# Altium PCB GL850G-PCB.PcbDoc
Units mil, origin at the board's own origin, x right, y up, seen from the top; angles counter-clockwise.
Board outline 1974.53 x 1974.45 mil, 2 copper layers (Top, Bottom), stack 62.543 mil thick; 40 components, 27 nets, 137 pads, 239 vias.
Unrouted connection lines stored in the file: 40.
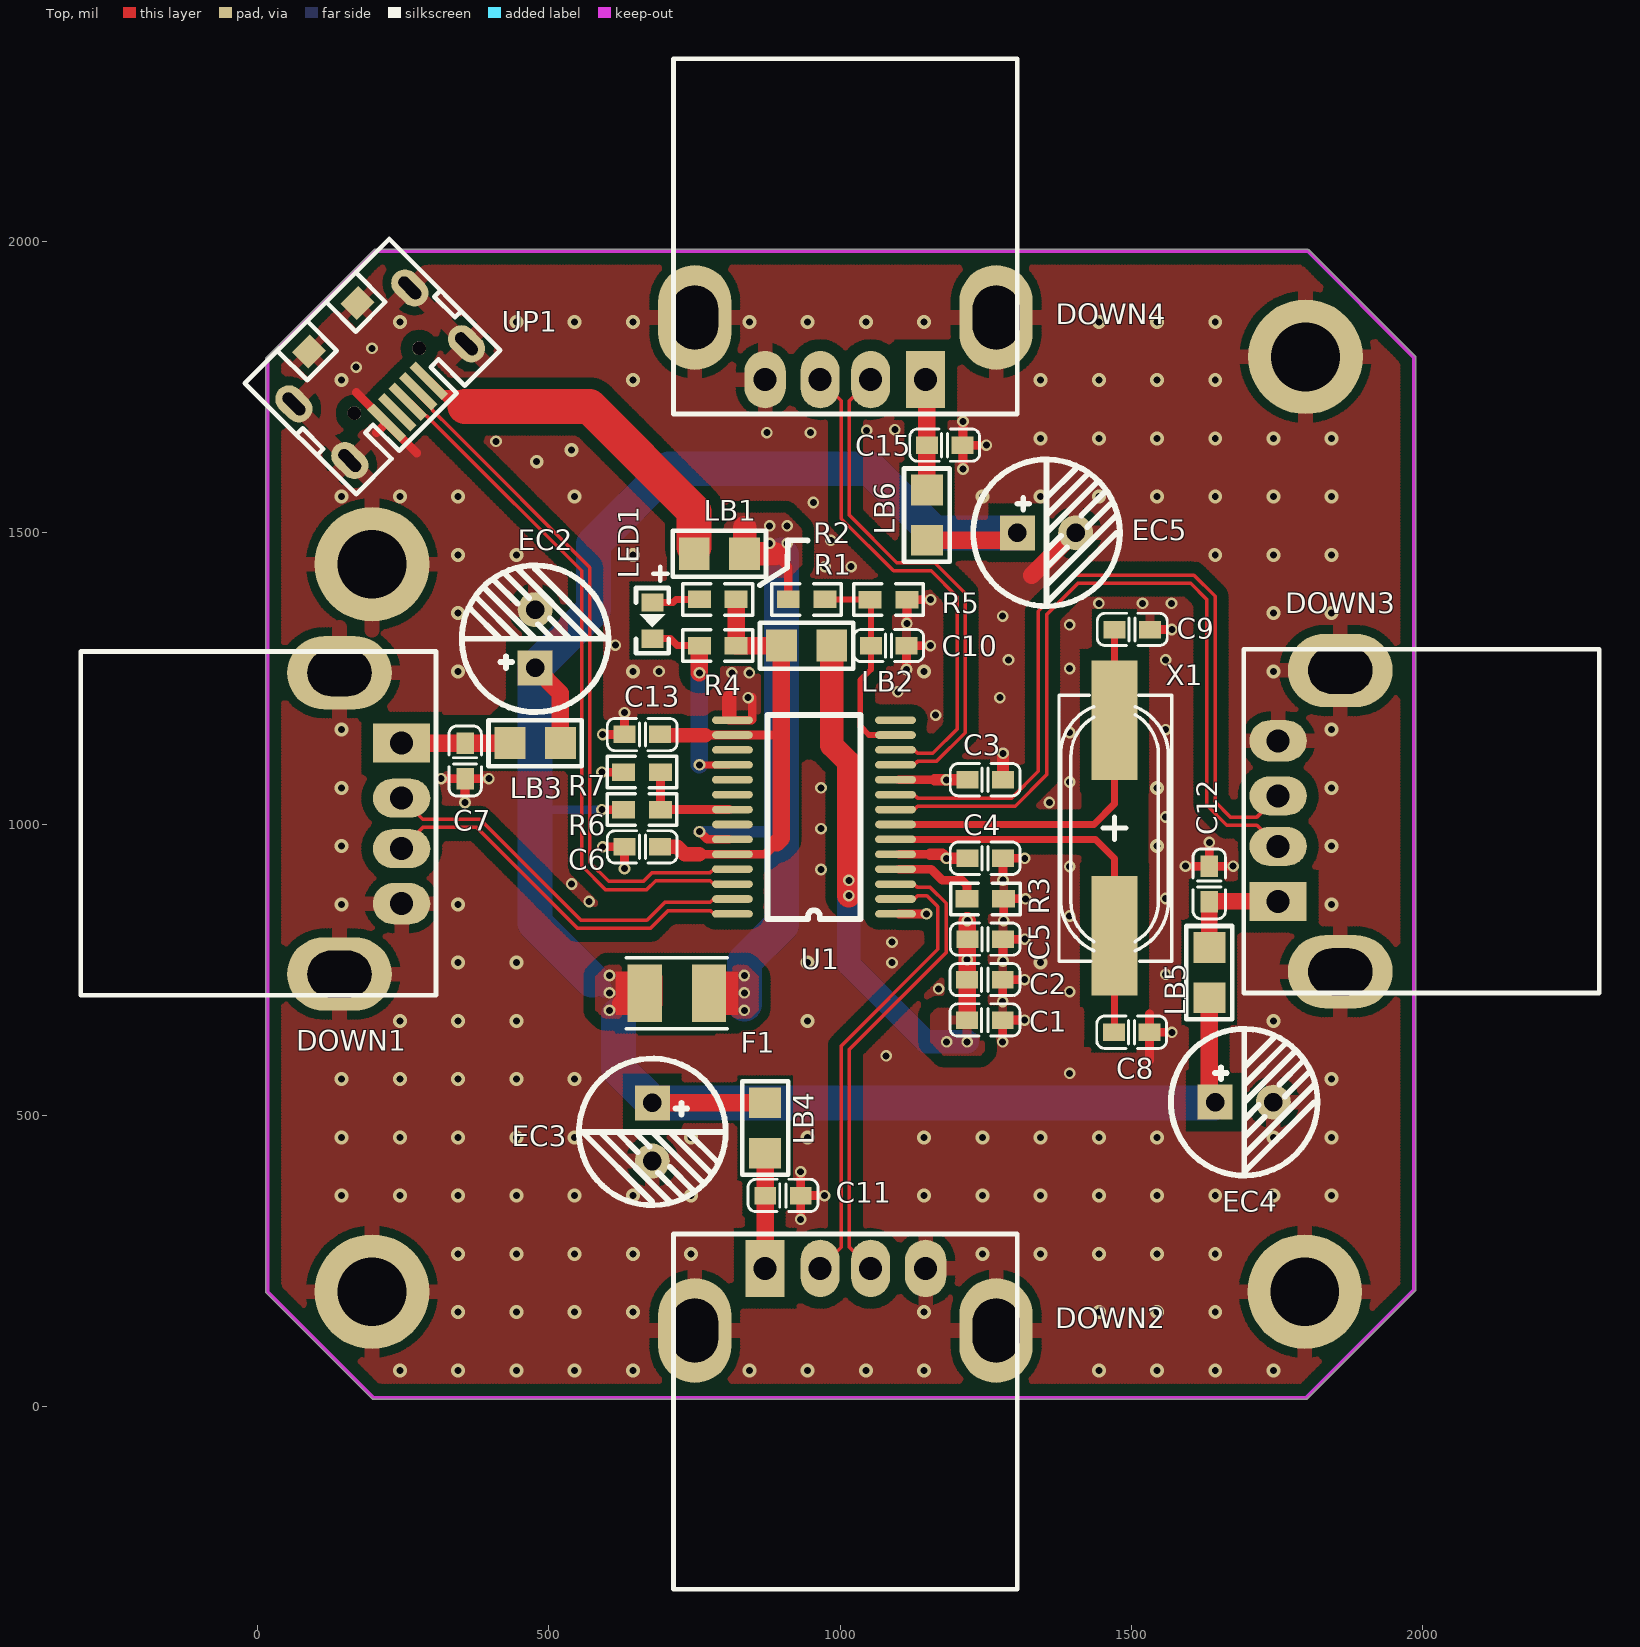
[diagram p0: Top view]
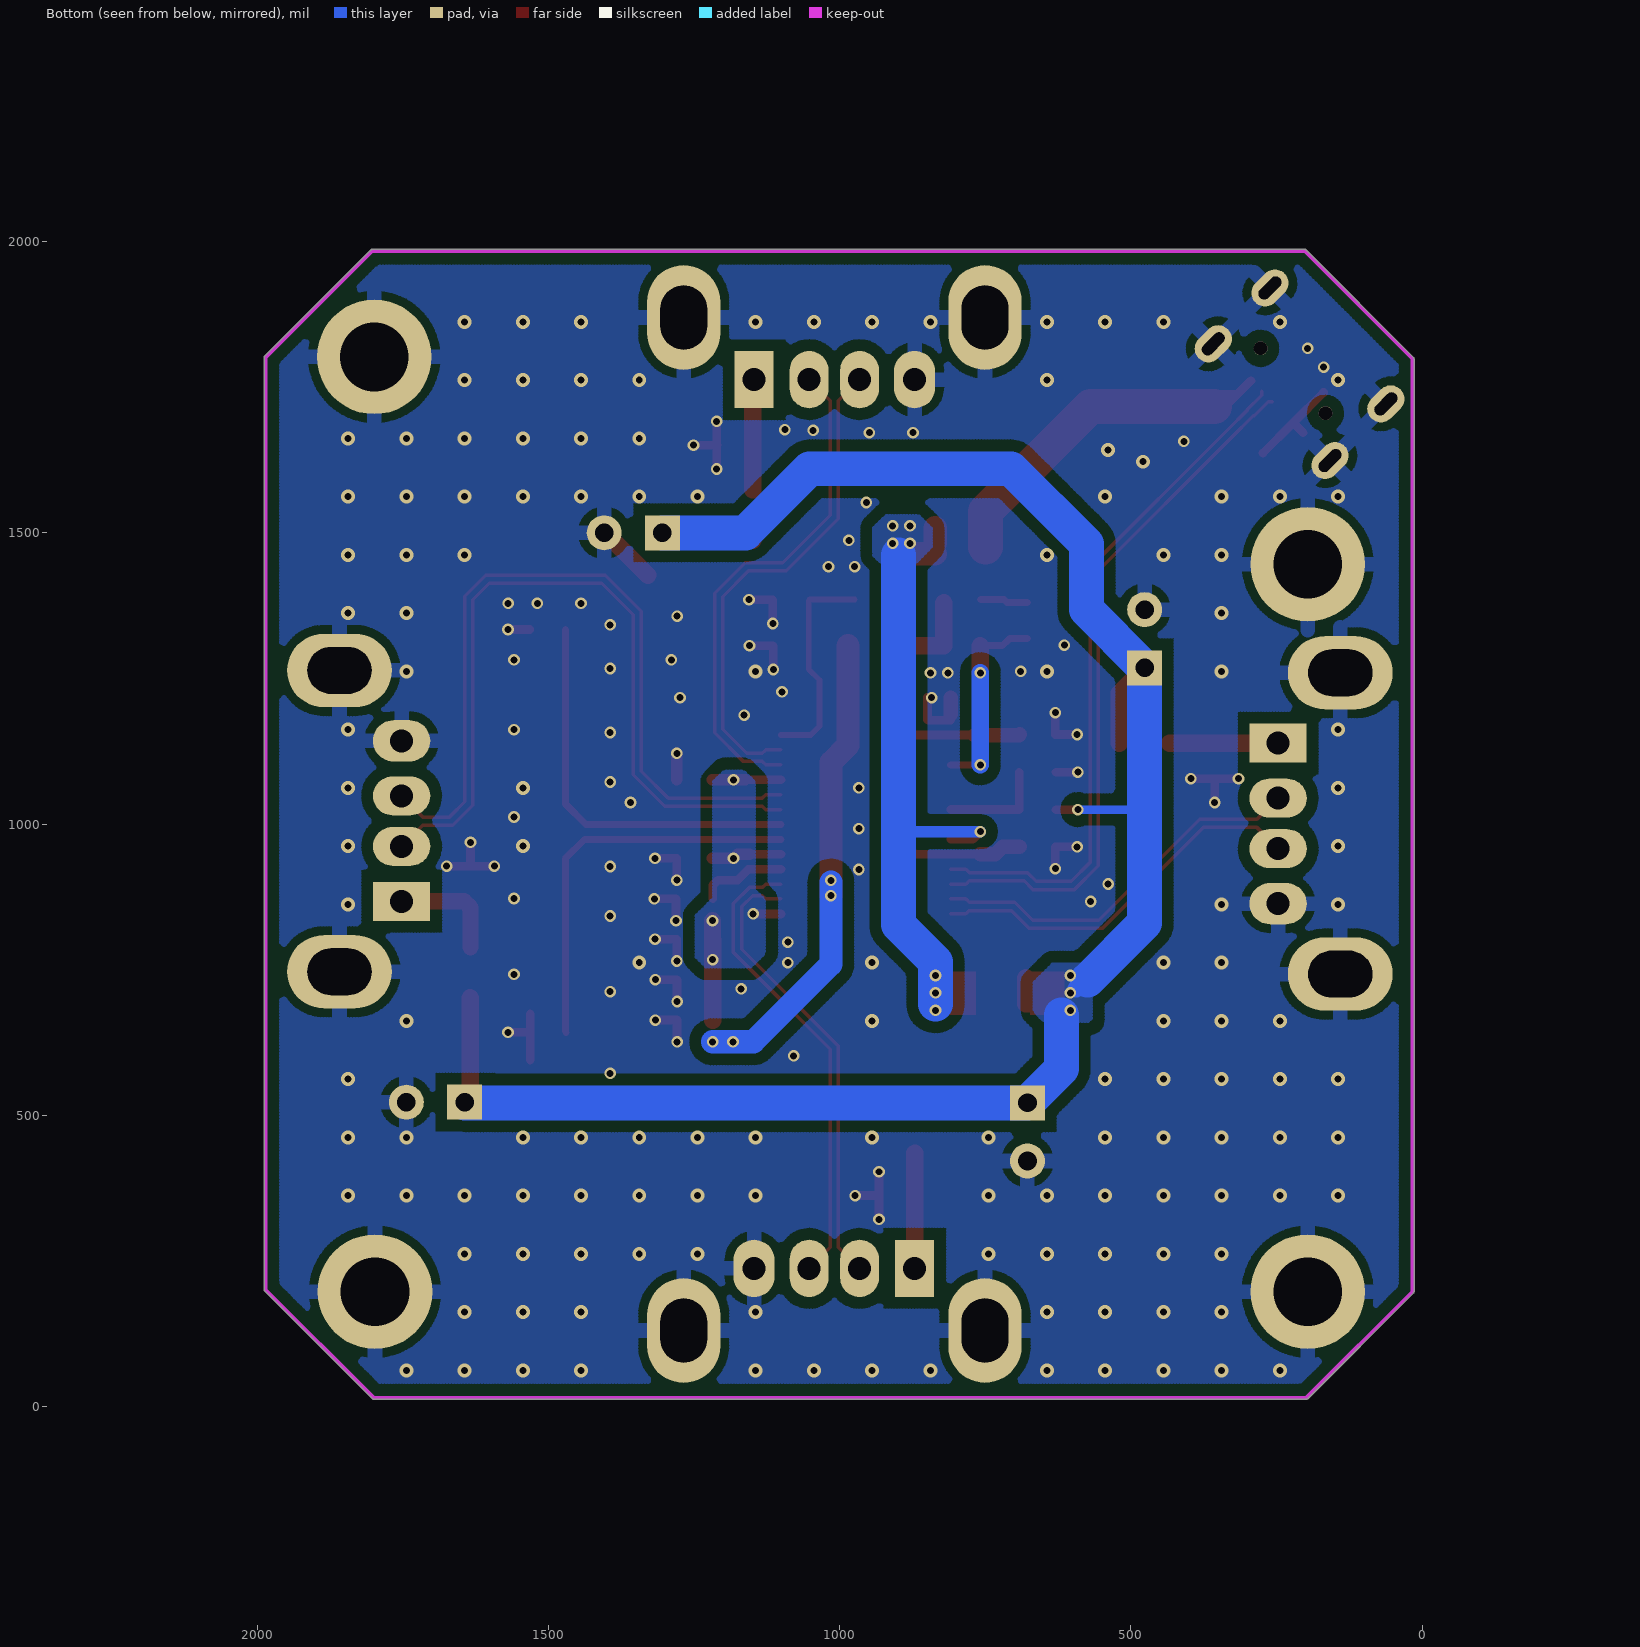
[diagram p1: Bottom view, seen from below]
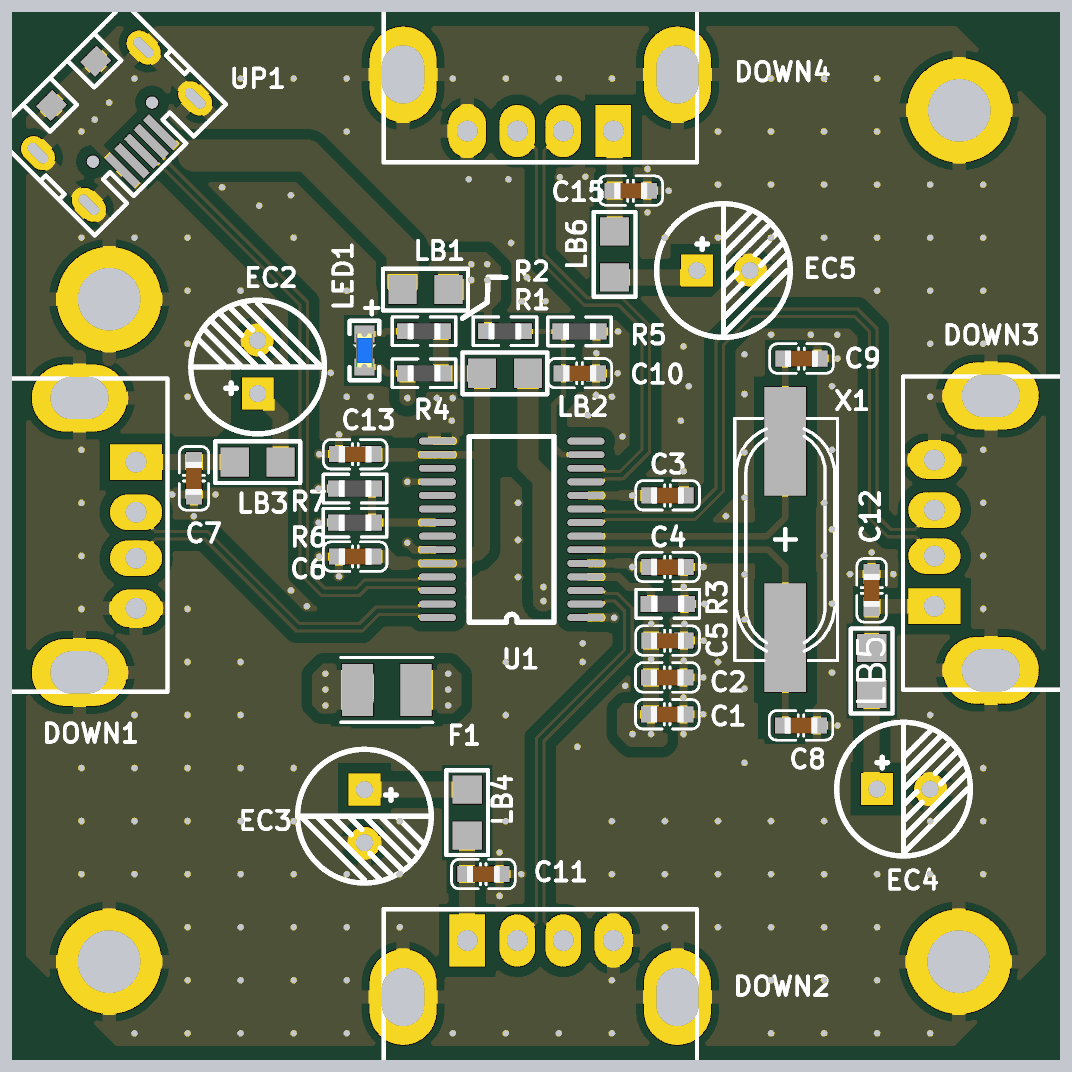
[diagram p2: 3D render of the assembled board from above, using the file's embedded part models]

## Layer stack, top to bottom
Solder Mask Top: solder mask 0.4, Solder Resist, Dk 3.5
Top: signal copper 1.35
Dielectric 1: dielectric 59.8425, FR-4, Dk 4.3
Bottom: signal copper 1.35
Solder Mask Bottom: solder mask 0.4, Solder Resist, Dk 3.5

## Board outline
196.32,13.16 14.62,194.87 14.63,194.86 cw(c16.75,197) 13.73,197 13.73,1799 cw(c16.75,1799) 14.63,1801.14 14.62,1801.13 199.32,1985.84 cw(c201.46,1983.71) 201.73,1986.71 cw(c202,1983.71) 202,1986.72 1802.54,1986.72 cw(c1802.54,1983.71) 1804.69,1985.83 1804.68,1985.84 1987.38,1803.13 1987.37,1803.14 cw(c1985.25,1801) 1988.27,1801 1988.27,202 cw(c1985.25,202) 1988.18,201.27 cw(c1985.25,200.54) 1988.27,200.54 cw(c1985.25,200.54) 1987.38,198.41 1802.13,13.16 1802.14,13.17 cw(c1800,15.29) 1800,12.28 202,12.28 cw(c202,15.29) 200.23,12.85 cw(c198.46,15.29)

## Design rules (kind name [scope] priority, off if disabled: settings)
Clearance "Clearance - Default - DEFAULT- SMD" [IsVia vs IsSMTPin] p1: gap=6 ignorepadtopadclearanceinfootprint=FALSE
Clearance "Clearance - Default - DEFAULT - Via" [IsVia vs IsVia] p2: gap=6 ignorepadtopadclearanceinfootprint=FALSE
Clearance "Clearance - Default - DEFAULT - Net" [All] p3: gap=6 ignorepadtopadclearanceinfootprint=FALSE except(0: Arc-Hole Track-Hole SMDPad-Hole THPad-Hole Via-Hole Fill-Hole Poly-Hole Region-Hole Text-Hole; 10: Text-Text; 20: Arc-Fill Arc-Poly Arc-Region Track-Fill Track-Poly Track-Region SMDPad-Fill SMDPad-Poly SMDPad-Region THPad-Fill THPad-Poly THPad-Region Via-Fill Via-Poly Via-Region Fill-Fill Fill-Poly Fill-Region Poly-Poly Poly-Region Region-Region)
ComponentClearance "ComponentClearance - Default - DEFAULT" [All] p1: gap=6 collisioncheckmode=3 verticalgap=10 showdistances=FALSE
DiffPairsRouting [InDifferentialPairClass('90Ohm')] p1: maxlimit=8 minlimit=8 mostfreqgap=8 toplayer_minwidth=6 toplayer_maxwidth=6 toplayer_prefwidth=6 bottomlayer_minwidth=6 bottomlayer_maxwidth=6 bottomlayer_prefwidth=6 maxuncoupledlength=500
HoleToHoleClearance "HoleToHoleClearance - Default - DEFAULT" [All] p1: gap=6 allowstackedmicrovias=TRUE
Length "Default Length" [All] p1: maxlimit=50000 minlimit=0
MaxMinImpedance "Default Impedance" [All] p1: minimum=50.00 maximum=150.0
ParallelSegment "Default Parallel Segment Same Layer" [All] p1: limit=1000 gap=200
ParallelSegment "Default Parallel Segment Adjasent" [All] p2: limit=1000 gap=200
PlaneConnect "Default PlaneConnect" [All] p1: planeconnectstyle=Direct reliefexpansion=20 reliefentries=4 reliefconductorwidth=15 reliefairgap=10
PolygonConnect PolygonConnect_1 [IsThruPin] p1: connectstyle=Relief reliefconductorwidth=25 reliefentries=4 polygonreliefangle="90 Angle" airgapwidth=15
PolygonConnect [All vs isvia] p2: connectstyle=Direct reliefconductorwidth=10 reliefentries=4 polygonreliefangle="90 Angle" airgapwidth=10
PolygonConnect "PolygonConnect - Default SMT" [IsSMTPin] p3: connectstyle=Relief reliefconductorwidth=15 reliefentries=4 polygonreliefangle="90 Angle" airgapwidth=10
PolygonConnect "PolygonConnect - Default Pad" [All] p4: connectstyle=Direct reliefconductorwidth=15 reliefentries=4 polygonreliefangle="45 Angle" airgapwidth=10
RoutingLayers "RoutingLayers - Default - DEFAULT" [All] p1: top layer_v5=TRUE bottom layer_v5=TRUE
RoutingPriority "RoutingPriority - Default - DEFAULT" [All] p1: routingpriority=3
RoutingTopology "Default Routing Topology" [All] p1: topology=Shortest
RoutingVias "RoutingVias - Default - DEFAULT" [All] p1: holewidth=14 width=24 viastyle="Through Hole" minholewidth=14 minwidth=24 maxholewidth=14 maxwidth=24
SMDToCorner "SMDToCorner - Default - DEFAULT" [All] p1: distance=60000
SolderMaskExpansion "SolderMaskExpansion from CAM settings" [All] p1: expansion=2 istentingtop=FALSE
Width "Default Width" [All] p1: maxlimit=60 minlimit=6 preferedwidth=6
23 further rules are at their usual default settings.

## Classes and differential pairs
differential pair class 90Ohm: USB1-90Ohm USB2-90Ohm USB3-90Ohm USB4-90Ohm USB5-90Ohm
differential pair USB5-90Ohm: +DM4 -DP4
differential pair USB4-90Ohm: +DM3 -DP3
differential pair USB3-90Ohm: +DM2 -DP2
differential pair USB2-90Ohm: +DM1 -DP1
differential pair USB1-90Ohm: +DM0 -DP0

## Components (designator, comment, footprint, x,y, rotation, side; value= is the part's Value field where it differs from the comment)
C1 "1uF" C0603 1248.46,663.32 r180 top
C2 "0.1uF" C0603 1248.46,732.75 r180 top
C3 "0.1uF" C0603 1249,1075.98 r180 top
C4 "0.1uF" C0603 1249,941.02 r180 top
C5 "0.1uF" C0603 1249,802.17 r180 top
C6 "0.1uF" C0603 660.11,960.82 r0 top
C7 "0.1uF" C0603 355.87,1108.29 r90 top
C8 "20P" C0603 1500.53,642.32 r180 top
C9 "20P" C0603 1501.51,1333.92 r180 top
C10 "0.1uF" C0603 1083.37,1306.26 r180 top
C11 "0.1uF" C0603 901.71,362 r180 top
C12 "0.1uF" C0603 1633.8,897.11 r270 top
C13 "10uF" C0603 660.11,1153.75 r0 top
C15 "0.1uF" C0603 1179.51,1650.46 r180 top
DOWN1 "USBA-A" USBA-A 247,1001 r90 top
DOWN2 "USBA-A" USBA-A 1009,237 r180 top
DOWN3 "USBA-A" USBA-A 1752,1005 r270 top
DOWN4 "USBA-A" USBA-A 1009,1763 r0 top
EC2 "100uF" CED-6_3-2_5 476.26,1318.1 r90 top
EC3 "100uF" CED-6_3-2_5 677.48,471.33 r270 top
EC4 "100uF" CED-6_3-2_5 1693.8,522.32 r0 top
EC5 "100uF" CED-6_3-2_5 1354.28,1499.97 r0 top
F1 "6V2A" 1210L 719.65,709.32 r0 top
LB1 "FB" L0805 792.7,1464 r180 top
LB2 "FB" L0805 942.33,1306.2 r180 top
LB3 "FB" L0805 476.26,1138.8 r180 top
LB4 "FB" L0805 871.2,478.02 r90 top
LB5 "FB" L0805 1633.8,744.95 r270 top
LB6 "FB" L0805 1149,1530.48 r270 top
LED1 "PWR_LED" LED_0603 677.48,1349.2 r270 top
R1 "10K" R0603 942.33,1385.6 r180 top
R2 "470R" R0603 789.85,1385.6 r0 top
R3 "680R 1%" R0603 1249.3,871.54 r180 top
R4 "100K" R0603 789.85,1306.2 r0 top
R5 "47K" R0603 1083.07,1385.2 r180 top
R6 "10K" R0603 659.81,1024.63 r180 top
R7 "20K" R0603 659.81,1088.94 r0 top
U1 "GL850AUSB" SSOP28 955,1012 r180 top
UP1 "SMD USB Micro" Micro_USB_MK5P 246.2,1736.21 r45 top
X1 "12MHz" XTAL-49SMA-H4.2 1471,993 r90 top

## Footprints (in the part's own frame and the unit in brackets; to place one, negate y for a bottom-side part, rotate by r counter-clockwise, add the part's x,y. Pads: shape width x height; smd on the part's side, far side on the other; paste and mask are expansions set on the pad)
1210L [mm]
  rect 1.5x2.5 smd: 1(-1.4,0) 2(1.4,0)
  silkscreen extent -2.2,-1.55 2.2,1.55
C0603 [mm] "Chip Capacitor, 2-Leads, Body 1.6x0.8mm, IPC Medium Density"
  rect 0.95x0.762 smd: 1(-0.775,0) 2(0.775,0)
  silkscreen extent -1.53,-0.71 1.53,0.7, body extent -0.8,-0.4 0.8,0.4, height 0.6
CED-6_3-2_5 [mil]
  rect 60x60 hole 32: 1(-50,0)
  round 60 hole 32: 2(50,0)
  silkscreen extent -126,-126 126,126
L0805 [mil]
  rect 53x55 smd: 1(-43.31,0) 2(43.31,0)
  silkscreen extent -80,-39 80,39
LED_0603 [mm]
  rect 0.8x0.96 smd: 1(-0.79,0) 2(0.79,0)
  silkscreen extent -2.35,-0.71 1.42,0.71, body extent -0.81,-0.4 0.81,0.4, height 0.6
Micro_USB_MK5P [mm]
  oval 1.2x1.8 hole 0.5 slot 1.2 at 90 deg: 0(-3.6,-0.43) 0(-3.575,3.04) 0(3.575,3.04) 0(3.6,-0.43)
  round 0.6 hole 0.6 unplated: 0(-2,0.89) 0(2,0.89)
  rect 1.1x1 smd: 0(-1.5,4.19) 0(1.5,4.19)
  rect 0.4x2 smd: 1(1.3,-0.4) 2(0.65,-0.4) 3(0,-0.4) 4(-0.65,-0.4) 5(-1.3,-0.4)
  silkscreen extent -4.45,-1.67 4.45,5.19
R0603 [mm] "Chip Resistor, 2-Leads, Body 1.6x0.8mm, IPC Medium Density"
  rect 1x0.762 smd: 1(-0.8,0) 2(0.8,0)
  silkscreen extent -1.52,-0.69 1.52,0.69, body extent -0.8,-0.4 0.8,0.4, height 0.38
SSOP28 [mil]
  oval 70x13 smd: 1(-140,166.4) 2(-140,140.8) 3(-140,115.2) 4(-140,89.6) 5(-140,64) 6(-140,38.4) 7(-140,12.8) 8(-140,-12.8) 9(-140,-38.4) 10(-140,-64) 11(-140,-89.6) 12(-140,-115.2) 13(-140,-140.8) 14(-140,-166.4) 15(140,-166.4) 16(140,-140.8) 17(140,-115.2) 18(140,-89.6) 19(140,-64) 20(140,-38.4) 21(140,-12.8) 22(140,12.8) 23(140,38.4) 24(140,64) 25(140,89.6) 26(140,115.2) 27(140,140.8) 28(140,166.4)
  silkscreen extent -80,-175 80,175
USBA-A [mil]
  rect 67x98 hole 39.37: 1(137.8,0)
  oval 66.93x98.43 hole 39.37: 2(43.31,0) 3(-43.31,0)
  oval 70.87x98.43 hole 39.37: 4(-137.8,0)
  oval 125.98x180 hole 80 slot 110 at 90 deg: G1(-258.66,106.69) G2(258.66,106.69)
  silkscreen extent -295,-59 295,551
XTAL-49SMA-H4.2 [mm]
  rect 5.2x2 smd: 1(-4.7,0) 2(4.7,0)
  silkscreen extent -5.8,-2.5 5.8,2.42

## Part data
C1 C2 C3 C4 C5 C6 C7 C8 C9 C10 C11 C12 C13 C15: library part C-0603
EC2 EC3 EC4 EC5: library part CE-100UF/16V
F1: library part FS-A_0
LB1 LB2 LB3 LB4 LB5 LB6: library part FB-0805
LED1: library part LED-3mm_0
R1 R2 R4 R5 R6 R7: library part R-0603
R3: library part "R-0603 1%"
U1: library part GLI8024-48_3
UP1: library part CNS-USBminiAB-A
X1: library part XD-49US-A

## Free pads (board coordinates)
  round 196.85 hole 118.11: 0(196.19,197) 0(196.19,1445.98) 0(1797.73,197) 0(1799,1802)

## Via types
v1: diameter 24, hole 12, Top to Bottom, tented both sides, 135 vias
v2: diameter 20, hole 12, Top to Bottom, tented both sides, 104 vias

## Nets (pads, with @x,y where several pads share a name; then routed paths per layer and width w, separated by ;. In a path a pad name is that pad's centre, name@x,y a point inside that pad or via, vN(x,y) a via of type N, cw(c..) or ccw(c..) an arc to the next point about the centre after c; other vN are vias at no path point)
AVDD: C1.2 C2.2 C3.2 C4.2 C5.2 LB2.1 U1.1 U1.5 U1.10 | length 1297.6
  Top w15: U1.1@1100.76,845.66 v2@1148.01,845.66 ; U1.5@1100.76,948.02 1154.79,948.02 ; U1.10@1100.76,1075.98 1162.22,1075.98
  Top w20: 1154.79,948.02 1175.24,948.02 v2(1182.24,941.02) C4.2 ; 1162.22,1075.98 C3.2 ; C5.2@1217.95,801.64 1218.22,801.91 C5.2
  Top w30: C1.2 C2.2 v2(1217.95,767.19) C5.2@1217.95,801.64 ; C5.2@1218.22,801.91 v2(1218.22,834.14)
  Top w40: LB2.1 985.64,1134.96 1014.62,1105.98 1014.62,900.67 1014.9,900.4 v2(1014.9,877.05)
  Bottom w40: v2@1014.9,900.4 1014.9,759.1 1147.93,626.07 v2(1182.94,626.07) v2(1217.95,626.07)
  other v2: 1148.31,845.66 1014.9,903.4 1182.24,1075.78
DGND: C1.1 C2.1 C3.1 C4.1 C5.1 C6.1 C7.1 C8.1 C9.1 C10.1 C11.1 C12.1 C13.1 C15.1 DOWN1.4 DOWN1.G1 DOWN1.G2 DOWN2.4 DOWN2.G1 DOWN2.G2 DOWN3.4 DOWN3.G1 DOWN3.G2 DOWN4.4 DOWN4.G1 DOWN4.G2 EC2.2 EC3.2 EC4.2 EC5.2 pad.0 R3.1 R5.1 R7.1 U1.15 UP1.0@62.05,1721.32 UP1.0@87.8,1811.1 UP1.0@157.95,1624.02 UP1.0@171.32,1894.62 UP1.0@261.1,1920.37 UP1.0@358.39,1824.46 UP1.5 | length 1797.4
  Top w15: 169.26,1740.78 UP1.5 ; 204,1671.74 UP1.5 ; 273.04,1637 UP1.5 ; v2(314.96,1077.78) C7.1 ; v2(355.87,1036.87) C7.1 ; v2(396.78,1077.78) C7.1 ; v2(590.91,1088.94) R7.1 ; v2(592.2,960.82) C6.1 v2(629.6,923.42) ; v2(592.2,1153.75) C13.1 v2(629.6,1191.15) ; U1.15@809.24,1178.34 847.75,1178.34 849,1179.58 v2@849,1217 ; v2(932.22,321.09) C11.1 ; v2(932.22,402.91) C11.1 ; v2(973.13,362) C11.1 ; v2(1113.88,1265.35) C10.1 v2(1154.79,1306.26) ; v2(1114.56,1344.29) R5.1 v2(1155.47,1385.2) ; C15.1 v2(1250.93,1650.46) ; v2(1211.01,1609.56) v2(1211.01,1691.37) ; v2(1278.98,625.92) C1.1 v2(1316.38,663.32) ; v2(1278.98,695.35) C2.1 v2(1316.38,732.75) ; v2(1279.51,764.77) C5.1 v2(1316.91,802.17) ; v2(1279.51,903.62) C4.1 v2(1316.91,941.02) ; v2(1280.8,834.14) R3.1 v2(1318.2,871.54) ; 1531.04,594.96 C8.1 1531.04,674.04 ; C8.1@1532.02,642.32 v2(1569.42,642.32) ; C9.1 v2(1569.42,1333.92) ; v2(1592.89,927.62) C12.1 ; v2(1633.8,968.53) C12.1 ; v2(1674.71,927.62) C12.1
  Top w20: C3.1 v2(1279.51,1121.36)
  Top w25: 809.24,1188.34 809.24,1216.76
  Top w30: 1329,1427 1401.97,1499.97 EC5.2
  other v1: 244,62 344,62 444,62 544,62 644,62 844,62 944,62 1044,62 1144,62 1444,62 1544,62 1644,62 1744,62 344,162 444,162 544,162 644,162 1144,162 1444,162 1544,162 1644,162 344,262 444,262 544,262 644,262 744,262 1244,262 1344,262 1444,262 1544,262 1644,262 144,362 244,362 344,362 444,362 544,362 644,362 744,362 1144,362 1244,362 1344,362 1444,362 1544,362 1644,362 1744,362 1844,362 144,462 244,462 344,462 444,462 544,462 744,462 944,462 1144,462 1244,462 1344,462 1444,462 1544,462 1744,462 1844,462 144,562 244,562 344,562 444,562 544,562 1844,562 244,662 344,662 444,662 944,662 1744,662 344,762 444,762 944,762 1344,762 144,862 344,862 1844,862 144,962 1544,962 1844,962 144,1062 1544,1062 1844,1062 144,1162 1844,1162 344,1262 644,1262 1144,1262 1744,1262 344,1362 1744,1362 1844,1362 344,1462 444,1462 644,1462 1644,1462 1744,1462 1844,1462 144,1562 244,1562 344,1562 544,1562 1244,1562 1344,1562 1444,1562 1544,1562 1644,1562 1744,1562 1844,1562 479,1622 539,1642 1344,1662 1444,1662 1544,1662 1644,1662 1744,1662 1844,1662 144,1762 644,1762 1344,1762 1444,1762 1544,1762 1644,1762 244,1862 444,1862 544,1862 644,1862 844,1862 944,1862 1044,1862 1144,1862 1444,1862 1544,1862 1644,1862
  other v2: 1394,572 1079,602 1394,712 1169,717 1559,742 1089,762 1089,797 1394,842 569,867 1559,872 539,897 967,922 1394,927 967,992 1559,1012 1359,1037 967,1062 1394,1072 1394,1157 1559,1162 1164,1187 842,1217 1274,1217 1099,1227 814,1259.67 844,1259.67 689,1262 1394,1267 1289,1282 1559,1282 614,1307 1394,1342 1279,1357 1444,1379 1519,1379 1569,1379 974,1442 1019,1442 984,1487 954,1552 409,1657 874,1672 949,1672 1045.49,1676.04 1094,1677 168.89,1784.53 196.19,1816.67
DM0: U1.25 UP1.2 | length 1192.6
  Top w6: UP1.2 275.43,1736.28 299.54,1712.18 299.54,1710.87 333.74,1676.67 570,1440.41 570,933.9 602.4,901.5 662.33,901.5 677.47,916.64 777.23,916.64 783.02,922.43 U1.25@809.24,922.43
DM1: DOWN1.2 U1.27 | length 664.3
  Top w6: DOWN1.2 283.31,1008 381.54,1008 554.94,834.6 668.3,834.6 699.16,865.46 777.23,865.46 783.02,871.25 U1.27@809.24,871.25
DM2: DOWN2.2 U1.2 | length 782.2
  Top w6: DOWN2.2 1002,273.31 1002,618.92 1167.79,784.7 1167.79,858.25 1148.99,877.05 1132.77,877.05 1126.98,871.25 U1.2@1100.76,871.25
DM3: DOWN3.2 U1.8 | length 1366.9
  Top w6: U1.8@1100.76,1024.8 1126.98,1024.8 1132.77,1030.59 1300.35,1030.59 1354.28,1084.52 1354.28,1359.25 1408.33,1413.3 1601.7,1413.3 1629.8,1385.2 1629.8,1032.2 1664,998 1715.69,998 DOWN3.2
DM4: DOWN4.2 U1.11 | length 878.1
  Top w6: DOWN4.2 1016,1726.69 1016,1529.97 1097.38,1448.59 1162.22,1448.59 1214.6,1396.21 1214.6,1156.9 1165.06,1107.36 1132.77,1107.36 1126.98,1101.57 U1.11@1100.76,1101.57
DP0: U1.26 UP1.3 | length 1204.2
  Top w6: UP1.3 264.23,1725.08 288.34,1700.97 289.64,1700.97 327.94,1662.67 556,1434.61 556,928.1 596.6,887.5 668.13,887.5 683.27,902.64 777.23,902.64 783.02,896.84 U1.26@809.24,896.84
DP1: DOWN1.3 U1.28 | length 664.3
  Top w6: DOWN1.3 283.31,994 375.74,994 549.14,820.6 674.1,820.6 704.96,851.46 777.23,851.46 783.02,845.66 U1.28@809.24,845.66
DP2: DOWN2.3 U1.3 | length 805.7
  Top w6: DOWN2.3 1016,273.31 1016,613.12 1182.24,779.35 1182.24,863.6 1154.79,891.05 1145.71,891.05 1132.77,891.05 1126.98,896.84 U1.3@1100.76,896.84
DP3: DOWN3.3 U1.9 | length 1366.9
  Top w6: U1.9@1100.76,1050.39 1126.98,1050.39 1132.77,1044.59 1294.55,1044.59 1340.28,1090.32 1340.28,1365.04 1402.54,1427.3 1607.5,1427.3 1643.8,1391 1643.8,1038 1669.8,1012 1715.69,1012 DOWN3.3
DP4: DOWN4.3 U1.12 | length 854.9
  Top w6: DOWN4.3 1002,1726.69 1002,1524.17 1091.58,1434.59 1156.42,1434.59 1200.6,1390.41 1200.6,1162.7 1159.26,1121.36 1132.77,1121.36 1126.98,1127.16 U1.12@1100.76,1127.16
DVDD: C6.2 C13.2 LB2.2 R2.2 R4.2 U1.16 U1.24 | length 915.8
  Top w15: 758.36,948.02 809.24,948.02 871.2,948.02 891.02,967.84 ; 767.99,1152.75 809.24,1152.75 899.02,1152.75
  Top w25: C6.2 720.15,960.82 732.95,948.02 758.36,948.02 ; C13.2 691.63,1152.75 767.99,1152.75
  Top w30: R2.2@821.35,1379.97 R4.2 LB2.2 899.02,1152.75 899.02,975.84 891.02,967.84
NetC7_2: C7.2 DOWN1.1 LB3.2 | length 185.9
  Top w30: DOWN1.1 C7.2 LB3.2
NetC11_2: C11.2 DOWN2.1 LB4.1 | length 197.7
  Top w30: DOWN2.1 C11.2 LB4.1
NetC12_2: C12.2 DOWN3.1 LB5.1 | length 190.9
  Top w28: LB5.1 1633.8,856.6 1644.4,867.2 DOWN3.1
NetC15_2: C15.2 DOWN4.1 LB6.1 | length 190.1
  Top w30: DOWN4.1 1149,1760.8 C15.2 LB6.1
NetLB1_2: LB1.2 UP1.1 | length 618.5
  Top w15: UP1.1 294.46,1760.34 UP1.1@294.72,1760.34 ; UP1.1@294.99,1760.34 UP1.1@294.72,1760.34 ; 362.21,1712.18 342.89,1712.18 UP1.1@294.72,1760.34
  Top w60: 355.87,1716.86 569.32,1716.86 749.39,1536.8 LB1.2@749.39,1475.73
NetLED1_1: LED1.1 R2.1 | length 83.1
  Top w12: LED1.1 712.82,1380.31 718.11,1385.6 R2.1
OVCUR1#: R6.1 R7.2 U1.21 | length 182.3
  Top w15: R7.2 R6.1 691.47,1024.8 U1.21@809.24,1024.8
PGANG: LED1.2 R4.1 U1.18 | length 341.3
  Top w12: LED1.2 708.3,1318.1 720.2,1306.2 R4.1 ; v2(758.36,1101.57) U1.18@809.24,1101.57
  Top w30: v2(758.36,1259.67) R4.1
  Bottom w30: v2(758.36,1101.57) v2(758.36,1259.67)
RESET#: C10.2 R1.1 R5.2 U1.13 | length 375.8
  Top w10: R1.1 974.23,1385.2 R5.2 1052.86,1383.91 C10.2 1052.86,1265.35 1034.57,1247.06 1034.57,1167.8 1049.57,1152.8 U1.13 ; U1.13@1095,1152.75 U1.13@1100.76,1152.75
RREF: R3.2 U1.4 | length 151.8
  Top w15: U1.4@1100.76,922.43 1156.43,922.43 1175.24,903.62 1209.02,903.62 1217.8,894.84 R3.2
VCC: F1.2 LB1.1 R1.2 U1.23 | length 1161.2
  Top w15: v2(758.36,986.84) 771.59,973.61 U1.23@809.24,973.61 ; 887.4,1464 910.83,1440.57 R1.2
  Top w40: LB1.1 887.4,1464 ; LB1.1@836.01,1482.75 836.01,1508.75
  Bottom w15: 895.84,986.84 899,990
  Bottom w20: v2(758.36,986.84) 895.84,986.84
  Bottom w60: 835.4,691 v2(835.4,710) v2(835.4,740) 835.4,763.4 899,827 899,990 899,1462
  other v2: 835.4,680 879,1482 909,1482 879,1512 909,1512
VDP: EC2.1 EC3.1 EC4.1 EC5.1 F1.1 LB3.1 LB4.2 LB5.2 LB6.2 R6.2 | length 3772.6
  Top w15: v2(590.91,1024.63) R6.2
  Top w30: EC2.1 519.57,1224.79 LB3.1 ; 623.32,691.32 680.28,691.32 F1.1@680.28,735.72 ; EC3.1 LB4.2 ; LB6.2 1291.48,1487.17 EC5.1 ; LB5.2 1633.8,532.32 EC4.1
  Bottom w15: 476.26,1025 476.63,1024.63 v2(590.91,1024.63)
  Bottom w30: 576.5,734.5 594,717 ; 619,672 619,682
  Bottom w50: EC4.1@1642.81,521.33 EC4.1
  Bottom w60: 574,732 476.26,829.74 476.26,1025 EC2.1 576.26,1368.1 576.26,1480.55 705.71,1610 1051.55,1610 1161.58,1499.97 EC5.1 ; 619,672 619,579.81 EC3.1 EC4.1@1642.81,521.33
  other v2: 603.9,680 603.9,710 603.9,740
X1: C8.2 U1.6 X1.1 | length 682.7
  Top w12: U1.6@1100.76,973.61 1438.21,973.61 1471,940.82 X1.1 1471,643.31 C8.2
X2: C9.2 U1.7 X1.2 | length 684.1
  Top w12: U1.7@1100.76,999.2 1435.5,999.2 1471,1034.71 X1.2 C9.2
pads on no net: U1.14 U1.17 U1.19 U1.20 U1.22 UP1.0@165.75,1705.31 UP1.0@277.1,1816.67 UP1.4

## Polygon pours and split planes (outlines as drawn)
DGND on Top "DGND_L01_P034" (hatched 90Degree grid 5 track 10, remove dead copper, pour order 34): 196.32,13.53 14.62,195.24 14.63,195.23 cw(c16.75,197.37) 13.73,197.37 13.73,1799.37 cw(c16.75,1799.37) 14.63,1801.51 14.62,1801.5 199.32,1986.21 cw(c201.46,1984.08) 201.73,1987.08 cw(c202,1984.08) 202,1987.09 1802.54,1987.09 cw(c1802.54,1984.08) 1804.69,1986.2 1804.68,1986.21 1987.38,1803.5 1987.37,1803.51 cw(c1985.25,1801.37) 1988.27,1801.37 1988.27,202.37 cw(c1985.25,202.37) 1988.18,201.64 cw(c1985.25,200.91) 1988.27,200.91 cw(c1985.25,200.91) 1987.38,198.78 1802.13,13.53 1802.14,13.54 cw(c1800,15.66) 1800,12.65 198.46,12.64 cw(c198.46,15.66)
AVDD on Top "AVDD_L01_P036" (hatched 90Degree grid 5 track 10, remove dead copper, pour order 36): 1244,612 1239,607 1179,607 1159,627 1159,671.21 1167.79,680 1244,680
VCC on Top "VCC_L01_P027" (hatched 90Degree grid 5 track 10, remove dead copper, pour order 27): 843.63,670.32 855.3,682 855.3,737 838.37,753.93 752.51,753.93 739.83,741.24 739.83,670.32
VDP on Top "VDP_L01_P017" (hatched 90Degree grid 5 track 10, remove dead copper, pour order 17): 595.68,670.32 584,682 584,737 600.93,753.93 686.79,753.93 699.48,741.24 699.48,670.32
VCC on Top "VCC_L01_P015" (hatched 90Degree grid 5 track 10, remove dead copper, pour order 15): 800,1427.3 800,1506.76 823.21,1529.97 905.03,1529.97 930,1505 930,1446.47 910.83,1427.3
DGND on Bottom "DGND_L02_P032" (hatched 90Degree grid 5 track 10, remove dead copper, pour order 32): 196.32,13.53 14.62,195.24 14.63,195.23 cw(c16.75,197.37) 13.73,197.37 13.73,1799.37 cw(c16.75,1799.37) 14.63,1801.51 14.62,1801.5 199.32,1986.21 cw(c201.46,1984.08) 201.73,1987.08 cw(c202,1984.08) 202,1987.09 1802.54,1987.09 cw(c1802.54,1984.08) 1804.69,1986.2 1804.68,1986.21 1987.38,1803.5 1987.37,1803.51 cw(c1985.25,1801.37) 1988.27,1801.37 1988.27,202.37 cw(c1985.25,202.37) 1988.18,201.64 cw(c1985.25,200.91) 1988.27,200.91 cw(c1985.25,200.91) 1987.38,198.78 1802.13,13.53 1802.14,13.54 cw(c1800,15.66) 1800,12.65 198.46,12.64 cw(c198.46,15.66)
AVDD on Bottom "AVDD_L02_P038" (hatched 90Degree grid 5 track 10, remove dead copper, pour order 38): 1197.06,1088.94 1214,1072 1214,872 1244,842 1244,772.03 1229,757.03 1152.97,757.03 1131,779 1131,869 1148.47,886.47 1148.47,1071.47 1165.94,1088.94
VCC on Bottom "VCC_L02_P023" (hatched 90Degree grid 5 track 10, remove dead copper, pour order 23): 879,1442 845,1476 845,1507 865,1527 919.76,1527 939.38,1507.38 939,1467 939,1462 919,1442
VDP on Bottom "VDP_L02_P021" (hatched 90Degree grid 5 track 10, remove dead copper, pour order 21): 570,757.03 633.97,757.03 664,727 664,679.74 647.58,663.32 570,663.32
VCC on Bottom "VCC_L02_P019" (hatched 90Degree grid 5 track 10, remove dead copper, pour order 19): 570,742.34

## Keep-outs
Keep-Out Layer:
  lines w6: 201.46,1983.71 16.75,1799 16.75,197 198.46,15.29 1800,15.29 1985.25,200.54 ; 202,1983.71 1800,1983.71 1802.54,1983.71 1985.25,1801 1985.25,202

## Other copper
Top:
  region net VCC: 825.3,747 765.83,747 765.83,672.32 825.3,672.32
  rectangle net VDP: 614,672.32 673.48,747
  pour cut-out: 195,1192 397.11,1192 437.11,1232 481.9,1232 497.14,1216.76 497.14,1177.88 476.26,1157 194.88,1157
  pour cut-out: 287,1124 407,1124 409,1122 409,1106.3 389,1086.3 294.11,1086.3 287.45,1092.96
  pour cut-out: 579,1142 655.11,1142 655.11,1113.11 654,1112 579,1112
  pour cut-out: 1064,1372 1094,1372 1094,1317 1064,1317
  pour cut-out: 1434,1097 1409,1072 1409,922 1434,897
  pour cut-out: 1679,987 1698.89,987 1703.89,982 1703.89,905.78 1690.1,892 1678,892 1679,893
  pour cut-out: 899,1106 956.68,1106 985.64,1134.96 985.64,1306.2 899.02,1306.2
  pour cut-out: 649,783.53 757.35,783.53 795.42,745.47 795.42,643.42 784,632 649,632
  pour cut-out: 1416.96,1305.4 1534,1305.4 1534,612 1414,612
  pour cut-out: 563,1090 667.35,1090 667.35,907.37 561.64,907.37 561.64,906.15
  region net NetLB1_2: 314.29,1745.08 397.5,1745.1 415.7,1726.9 415.7,1692.3 367.07,1692.3

## Silkscreen, mask and mechanical layers (free items; w line width, h text height)
Silkscreen Top:
  lines w10: 862.33,1409.97 909,1439.97 910.57,1487.31 944,1487